# Altium PCB PCB.PcbDoc (part 4 of 4)
Units mm, origin at the board's own origin, x right, y up, seen from the top; angles counter-clockwise.
Board outline 90 x 90 mm, 4 copper layers (Top Layer (Signal), Int1 (GND), Int2 (Signal), Bottom Layer (Signal)), stack 1.586 mm thick; 151 components, 306 nets, 1178 pads, 350 vias.
Unrouted connection lines stored in the file: 80.
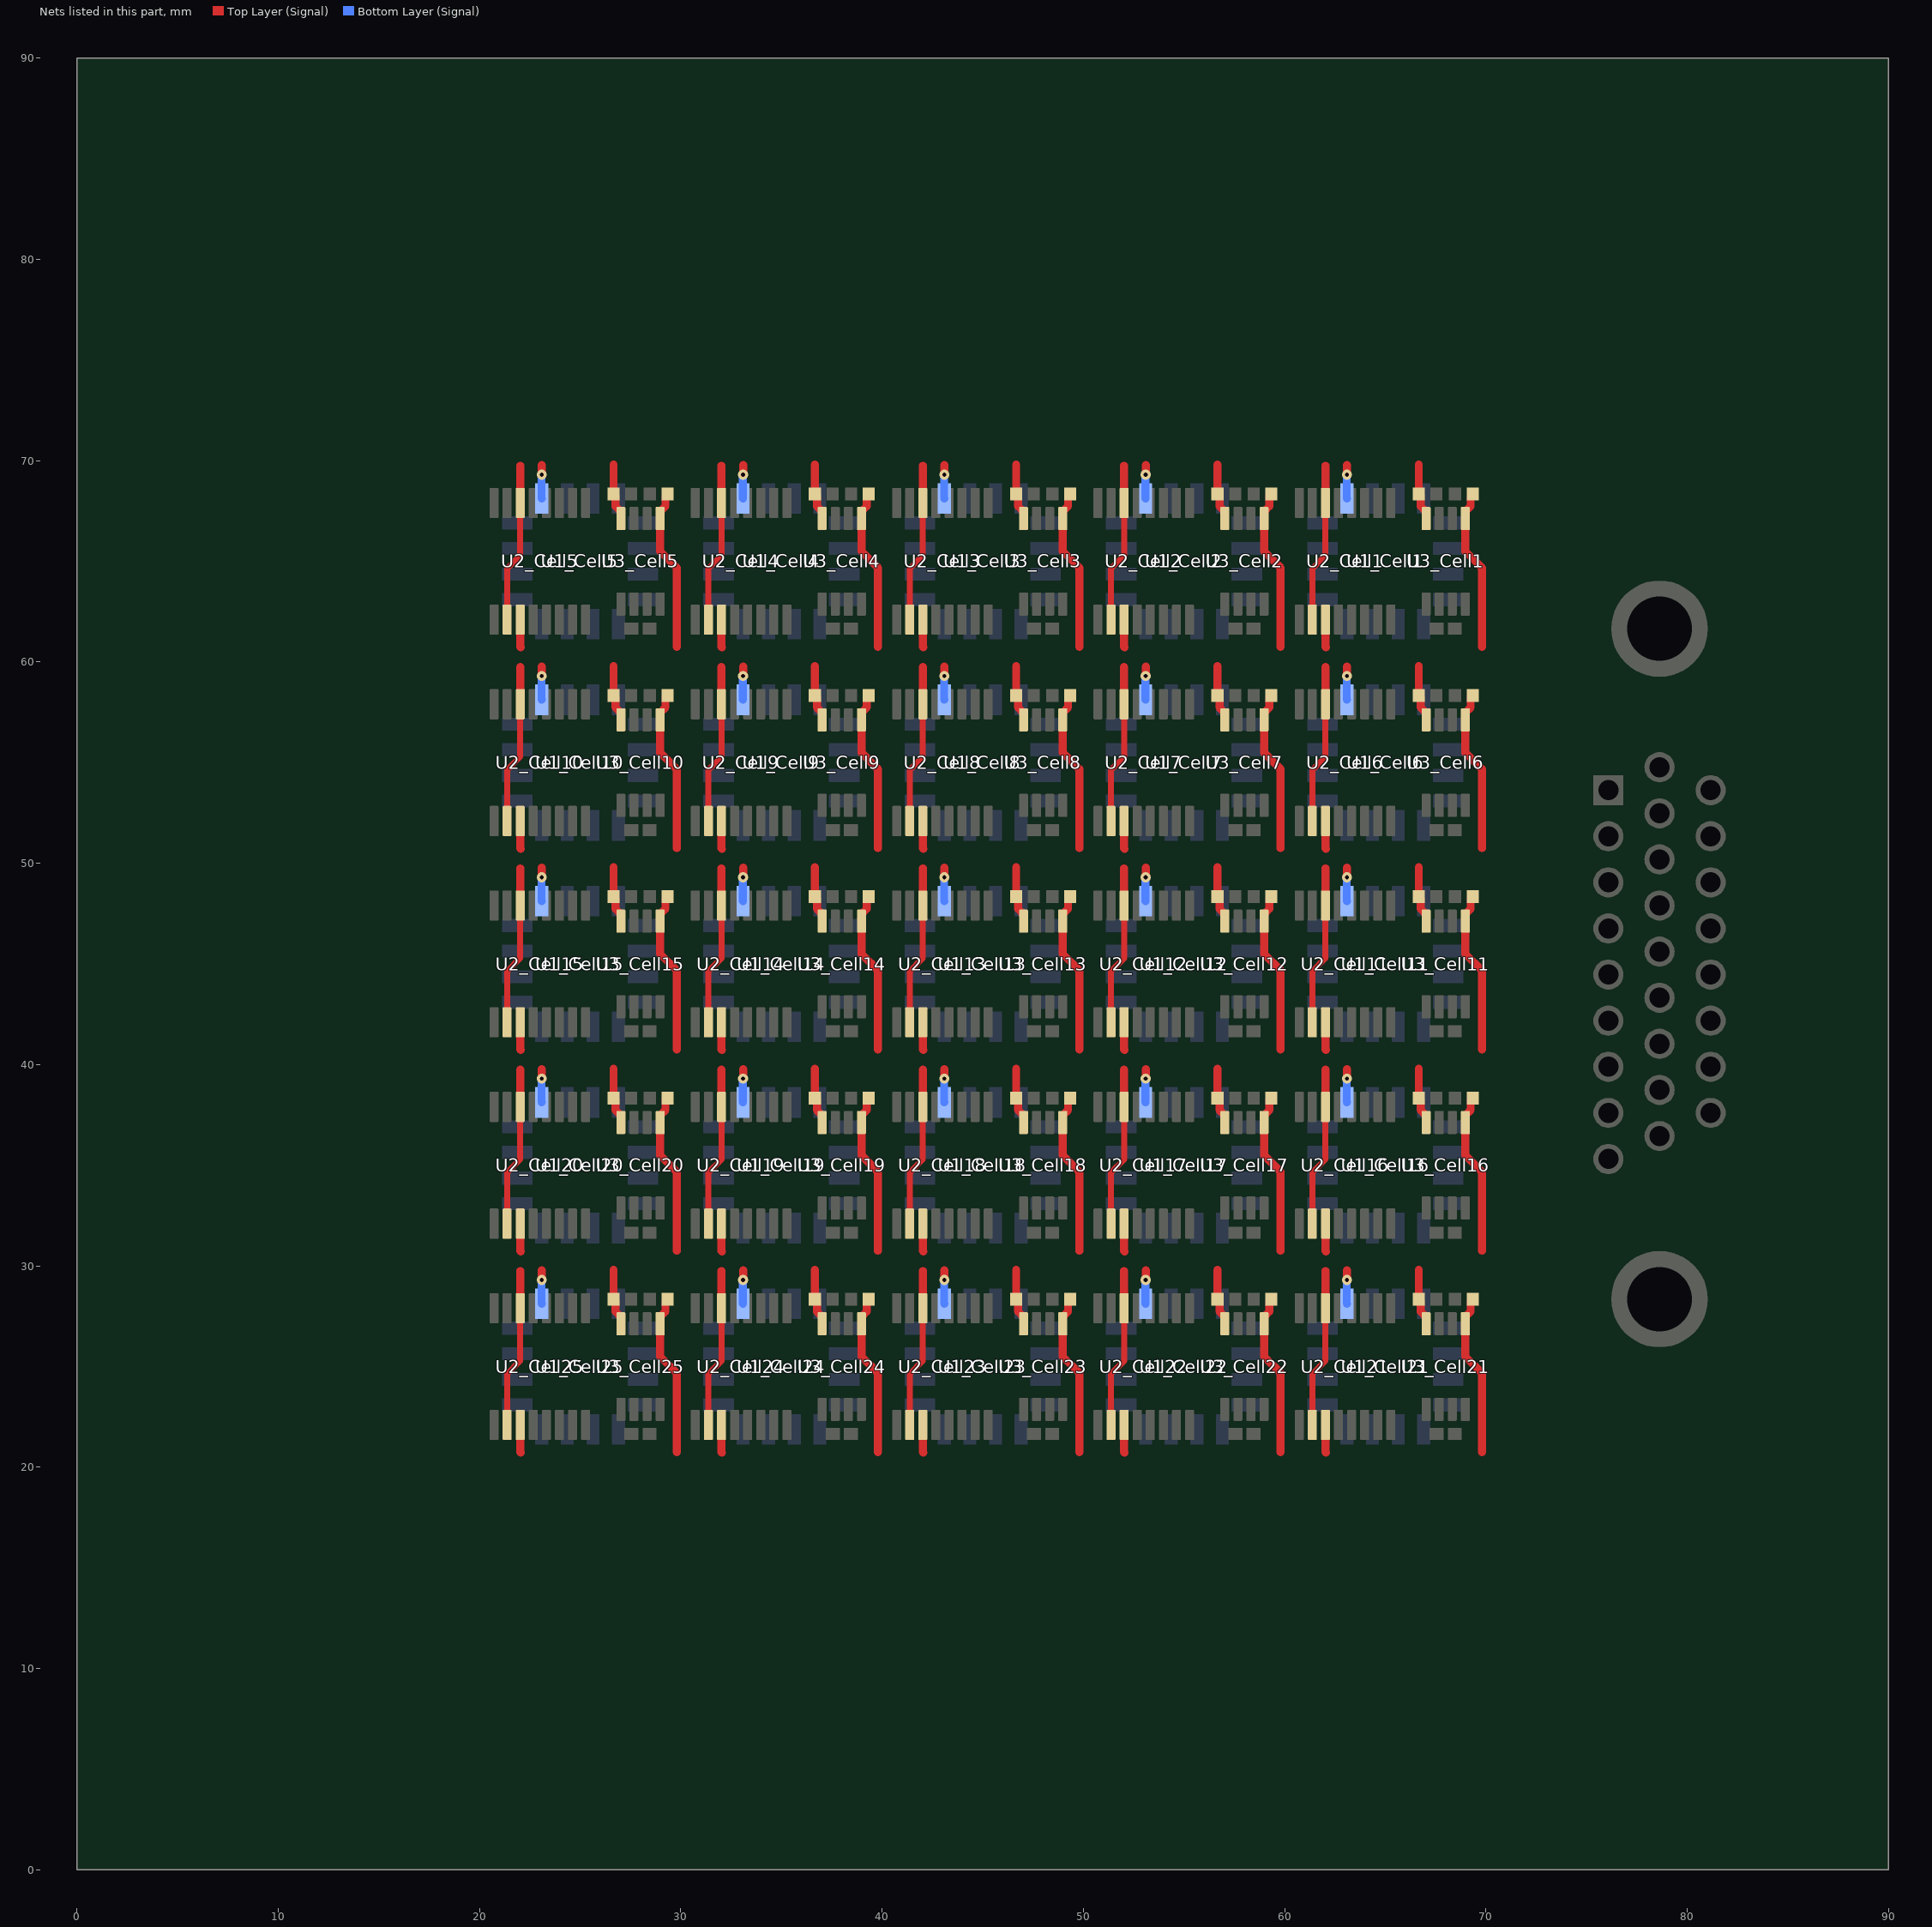
[diagram p6: the nets of this part, all layers, seen from the top]

## Via types
v1: diameter 0.5, hole 0.2, Top Layer (Signal) to Bottom Layer (Signal), 350 vias

## Nets (pads, with @x,y where several pads share a name; then routed paths per layer and width w, separated by ;. In a path a pad name is that pad's centre, name@x,y a point inside that pad or via, vN(x,y) a via of type N, cw(c..) or ccw(c..) an arc to the next point about the centre after c; other vN are vias at no path point) (continued)
V+: C1_Cell1.2 C1_Cell2.2 C1_Cell3.2 C1_Cell4.2 C1_Cell5.2 C1_Cell6.2 C1_Cell7.2 C1_Cell8.2 C1_Cell9.2 C1_Cell10.2 C1_Cell11.2 C1_Cell12.2 C1_Cell13.2 C1_Cell14.2 C1_Cell15.2 C1_Cell16.2 C1_Cell17.2 C1_Cell18.2 C1_Cell19.2 C1_Cell20.2 C1_Cell21.2 C1_Cell22.2 C1_Cell23.2 C1_Cell24.2 C1_Cell25.2 U1_Cell1.1 U1_Cell2.1 U1_Cell3.1 U1_Cell4.1 U1_Cell5.1 U1_Cell6.1 U1_Cell7.1 U1_Cell8.1 U1_Cell9.1 U1_Cell10.1 U1_Cell11.1 U1_Cell12.1 U1_Cell13.1 U1_Cell14.1 U1_Cell15.1 U1_Cell16.1 U1_Cell17.1 U1_Cell18.1 U1_Cell19.1 U1_Cell20.1 U1_Cell21.1 U1_Cell22.1 U1_Cell23.1 U1_Cell24.1 U1_Cell25.1 U2_Cell1.2 U2_Cell1.14 U2_Cell2.2 U2_Cell2.14 U2_Cell3.2 U2_Cell3.14 U2_Cell4.2 U2_Cell4.14 U2_Cell5.2 U2_Cell5.14 U2_Cell6.2 U2_Cell6.14 U2_Cell7.2 U2_Cell7.14 U2_Cell8.2 U2_Cell8.14 U2_Cell9.2 U2_Cell9.14 U2_Cell10.2 U2_Cell10.14 U2_Cell11.2 U2_Cell11.14 U2_Cell12.2 U2_Cell12.14 U2_Cell13.2 U2_Cell13.14 U2_Cell14.2 U2_Cell14.14 U2_Cell15.2 U2_Cell15.14 U2_Cell16.2 U2_Cell16.14 U2_Cell17.2 U2_Cell17.14 U2_Cell18.2 U2_Cell18.14 U2_Cell19.2 U2_Cell19.14 U2_Cell20.2 U2_Cell20.14 U2_Cell21.2 U2_Cell21.14 U2_Cell22.2 U2_Cell22.14 U2_Cell23.2 U2_Cell23.14 U2_Cell24.2 U2_Cell24.14 U2_Cell25.2 U2_Cell25.14 U3_Cell1.8 U3_Cell2.8 U3_Cell3.8 U3_Cell4.8 U3_Cell5.8 U3_Cell6.8 U3_Cell7.8 U3_Cell8.8 U3_Cell9.8 U3_Cell10.8 U3_Cell11.8 U3_Cell12.8 U3_Cell13.8 U3_Cell14.8 U3_Cell15.8 U3_Cell16.8 U3_Cell17.8 U3_Cell18.8 U3_Cell19.8 U3_Cell20.8 U3_Cell21.8 U3_Cell22.8 U3_Cell23.8 U3_Cell24.8 U3_Cell25.8 | length 310.2
  Top Layer (Signal) w0.3: U2_Cell25.2@21.375,22.1 21.375,24.637 22.025,25.287 U2_Cell25.14@22.025,27.9 ; U2_Cell20.2@21.375,32.1 21.375,34.637 22.025,35.287 U2_Cell20.14@22.025,37.9 ; U2_Cell15.2@21.375,42.1 21.375,44.637 22.025,45.287 U2_Cell15.14@22.025,47.9 ; U2_Cell10.2@21.375,52.1 21.375,54.637 22.025,55.287 U2_Cell10.14@22.025,57.9 ; U2_Cell5.2@21.375,62.1 21.375,64.637 22.025,65.287 U2_Cell5.14@22.025,67.9 ; U2_Cell24.2@31.375,22.1 31.375,24.637 32.025,25.287 U2_Cell24.14@32.025,27.9 ; U2_Cell19.2@31.375,32.1 31.375,34.637 32.025,35.287 U2_Cell19.14@32.025,37.9 ; U2_Cell14.2@31.375,42.1 31.375,44.637 32.025,45.287 U2_Cell14.14@32.025,47.9 ; U2_Cell9.2@31.375,52.1 31.375,54.637 32.025,55.287 U2_Cell9.14@32.025,57.9 ; U2_Cell4.2@31.375,62.1 31.375,64.637 32.025,65.287 U2_Cell4.14@32.025,67.9 ; U2_Cell23.2@41.375,22.1 41.375,24.637 42.025,25.287 U2_Cell23.14@42.025,27.9 ; U2_Cell18.2@41.375,32.1 41.375,34.637 42.025,35.287 U2_Cell18.14@42.025,37.9 ; U2_Cell13.2@41.375,42.1 41.375,44.637 42.025,45.287 U2_Cell13.14@42.025,47.9 ; U2_Cell8.2@41.375,52.1 41.375,54.637 42.025,55.287 U2_Cell8.14@42.025,57.9 ; U2_Cell3.2@41.375,62.1 41.375,64.637 42.025,65.287 U2_Cell3.14@42.025,67.9 ; U2_Cell22.2@51.375,22.1 51.375,24.637 52.025,25.287 U2_Cell22.14@52.025,27.9 ; U2_Cell17.2@51.375,32.1 51.375,34.637 52.025,35.287 U2_Cell17.14@52.025,37.9 ; U2_Cell12.2@51.375,42.1 51.375,44.637 52.025,45.287 U2_Cell12.14@52.025,47.9 ; U2_Cell7.2@51.375,52.1 51.375,54.637 52.025,55.287 U2_Cell7.14@52.025,57.9 ; U2_Cell2.2@51.375,62.1 51.375,64.637 52.025,65.287 U2_Cell2.14@52.025,67.9 ; U2_Cell21.2@61.375,22.1 61.375,24.637 62.025,25.287 U2_Cell21.14@62.025,27.9 ; U2_Cell16.2@61.375,32.1 61.375,34.637 62.025,35.287 U2_Cell16.14@62.025,37.9 ; U2_Cell11.2@61.375,42.1 61.375,44.637 62.025,45.287 U2_Cell11.14@62.025,47.9 ; U2_Cell6.2@61.375,52.1 61.375,54.637 62.025,55.287 U2_Cell6.14@62.025,57.9 ; U2_Cell1.2@61.375,62.1 61.375,64.637 62.025,65.287 U2_Cell1.14@62.025,67.9
  Top Layer (Signal) w0.4: U2_Cell25.14@22.025,27.9 22.025,29.75 ; U2_Cell20.14@22.025,37.9 22.025,39.75 ; U2_Cell15.14@22.025,47.9 22.025,49.75 ; U2_Cell10.14@22.025,57.9 22.025,59.75 ; U2_Cell5.14@22.025,67.9 22.025,69.75 ; v1(23.095,29.3) 23.1,29.305 23.1,29.775 ; v1(23.095,39.3) 23.1,39.305 23.1,39.775 ; v1(23.095,49.3) 23.1,49.305 23.1,49.775 ; v1(23.095,59.3) 23.1,59.305 23.1,59.775 ; v1(23.095,69.3) 23.1,69.305 23.1,69.775 ; 26.66,29.8 C1_Cell25.2@26.66,28.335 26.76,28.235 26.76,27.74 27.025,27.475 U3_Cell25.8@27.025,27.125 ; 26.66,39.8 C1_Cell20.2@26.66,38.335 26.76,38.235 26.76,37.74 27.025,37.475 U3_Cell20.8@27.025,37.125 ; 26.66,49.8 C1_Cell15.2@26.66,48.335 26.76,48.235 26.76,47.74 27.025,47.475 U3_Cell15.8@27.025,47.125 ; 26.66,59.8 C1_Cell10.2@26.66,58.335 26.76,58.235 26.76,57.74 27.025,57.475 U3_Cell10.8@27.025,57.125 ; 26.66,69.8 C1_Cell5.2@26.66,68.335 26.76,68.235 26.76,67.74 27.025,67.475 U3_Cell5.8@27.025,67.125 ; U2_Cell24.14@32.025,27.9 32.025,29.75 ; U2_Cell19.14@32.025,37.9 32.025,39.75 ; U2_Cell14.14@32.025,47.9 32.025,49.75 ; U2_Cell9.14@32.025,57.9 32.025,59.75 ; U2_Cell4.14@32.025,67.9 32.025,69.75 ; v1(33.095,29.3) 33.1,29.305 33.1,29.775 ; v1(33.095,39.3) 33.1,39.305 33.1,39.775 ; v1(33.095,49.3) 33.1,49.305 33.1,49.775 ; v1(33.095,59.3) 33.1,59.305 33.1,59.775 ; v1(33.095,69.3) 33.1,69.305 33.1,69.775 ; 36.66,29.8 C1_Cell24.2@36.66,28.335 36.76,28.235 36.76,27.74 37.025,27.475 U3_Cell24.8@37.025,27.125 ; 36.66,39.8 C1_Cell19.2@36.66,38.335 36.76,38.235 36.76,37.74 37.025,37.475 U3_Cell19.8@37.025,37.125 ; 36.66,49.8 C1_Cell14.2@36.66,48.335 36.76,48.235 36.76,47.74 37.025,47.475 U3_Cell14.8@37.025,47.125 ; 36.66,59.8 C1_Cell9.2@36.66,58.335 36.76,58.235 36.76,57.74 37.025,57.475 U3_Cell9.8@37.025,57.125 ; 36.66,69.8 C1_Cell4.2@36.66,68.335 36.76,68.235 36.76,67.74 37.025,67.475 U3_Cell4.8@37.025,67.125 ; U2_Cell23.14@42.025,27.9 42.025,29.75 ; U2_Cell18.14@42.025,37.9 42.025,39.75 ; U2_Cell13.14@42.025,47.9 42.025,49.75 ; U2_Cell8.14@42.025,57.9 42.025,59.75 ; U2_Cell3.14@42.025,67.9 42.025,69.75 ; v1(43.095,29.3) 43.1,29.305 43.1,29.775 ; v1(43.095,39.3) 43.1,39.305 43.1,39.775 ; v1(43.095,49.3) 43.1,49.305 43.1,49.775 ; v1(43.095,59.3) 43.1,59.305 43.1,59.775 ; v1(43.095,69.3) 43.1,69.305 43.1,69.775 ; 46.66,29.8 C1_Cell23.2@46.66,28.335 46.76,28.235 46.76,27.74 47.025,27.475 U3_Cell23.8@47.025,27.125 ; 46.66,39.8 C1_Cell18.2@46.66,38.335 46.76,38.235 46.76,37.74 47.025,37.475 U3_Cell18.8@47.025,37.125 ; 46.66,49.8 C1_Cell13.2@46.66,48.335 46.76,48.235 46.76,47.74 47.025,47.475 U3_Cell13.8@47.025,47.125 ; 46.66,59.8 C1_Cell8.2@46.66,58.335 46.76,58.235 46.76,57.74 47.025,57.475 U3_Cell8.8@47.025,57.125 ; 46.66,69.8 C1_Cell3.2@46.66,68.335 46.76,68.235 46.76,67.74 47.025,67.475 U3_Cell3.8@47.025,67.125 ; U2_Cell22.14@52.025,27.9 52.025,29.75 ; U2_Cell17.14@52.025,37.9 52.025,39.75 ; U2_Cell12.14@52.025,47.9 52.025,49.75 ; U2_Cell7.14@52.025,57.9 52.025,59.75 ; U2_Cell2.14@52.025,67.9 52.025,69.75 ; v1(53.095,29.3) 53.1,29.305 53.1,29.775 ; v1(53.095,39.3) 53.1,39.305 53.1,39.775 ; v1(53.095,49.3) 53.1,49.305 53.1,49.775 ; v1(53.095,59.3) 53.1,59.305 53.1,59.775 ; v1(53.095,69.3) 53.1,69.305 53.1,69.775 ; 56.66,29.8 C1_Cell22.2@56.66,28.335 56.76,28.235 56.76,27.74 57.025,27.475 U3_Cell22.8@57.025,27.125 ; 56.66,39.8 C1_Cell17.2@56.66,38.335 56.76,38.235 56.76,37.74 57.025,37.475 U3_Cell17.8@57.025,37.125 ; 56.66,49.8 C1_Cell12.2@56.66,48.335 56.76,48.235 56.76,47.74 57.025,47.475 U3_Cell12.8@57.025,47.125 ; 56.66,59.8 C1_Cell7.2@56.66,58.335 56.76,58.235 56.76,57.74 57.025,57.475 U3_Cell7.8@57.025,57.125 ; 56.66,69.8 C1_Cell2.2@56.66,68.335 56.76,68.235 56.76,67.74 57.025,67.475 U3_Cell2.8@57.025,67.125 ; U2_Cell21.14@62.025,27.9 62.025,29.75 ; U2_Cell16.14@62.025,37.9 62.025,39.75 ; U2_Cell11.14@62.025,47.9 62.025,49.75 ; U2_Cell6.14@62.025,57.9 62.025,59.75 ; U2_Cell1.14@62.025,67.9 62.025,69.75 ; v1(63.095,29.3) 63.1,29.305 63.1,29.775 ; v1(63.095,39.3) 63.1,39.305 63.1,39.775 ; v1(63.095,49.3) 63.1,49.305 63.1,49.775 ; v1(63.095,59.3) 63.1,59.305 63.1,59.775 ; v1(63.095,69.3) 63.1,69.305 63.1,69.775 ; 66.66,29.8 C1_Cell21.2@66.66,28.335 66.76,28.235 66.76,27.74 67.025,27.475 U3_Cell21.8@67.025,27.125 ; 66.66,39.8 C1_Cell16.2@66.66,38.335 66.76,38.235 66.76,37.74 67.025,37.475 U3_Cell16.8@67.025,37.125 ; 66.66,49.8 C1_Cell11.2@66.66,48.335 66.76,48.235 66.76,47.74 67.025,47.475 U3_Cell11.8@67.025,47.125 ; 66.66,59.8 C1_Cell6.2@66.66,58.335 66.76,58.235 66.76,57.74 67.025,57.475 U3_Cell6.8@67.025,57.125 ; 66.66,69.8 C1_Cell1.2@66.66,68.335 66.76,68.235 66.76,67.74 67.025,67.475 U3_Cell1.8@67.025,67.125
  Bottom Layer (Signal) w0.4: v1@23.075,29.3 23.085,29.29 23.085,28.133 U1_Cell25.1@23.095,28.123 ; v1@23.075,39.3 23.085,39.29 23.085,38.133 U1_Cell20.1@23.095,38.123 ; v1@23.075,49.3 23.085,49.29 23.085,48.133 U1_Cell15.1@23.095,48.123 ; v1@23.075,59.3 23.085,59.29 23.085,58.133 U1_Cell10.1@23.095,58.123 ; v1@23.075,69.3 23.085,69.29 23.085,68.133 U1_Cell5.1@23.095,68.123 ; v1@33.075,29.3 33.085,29.29 33.085,28.133 U1_Cell24.1@33.095,28.123 ; v1@33.075,39.3 33.085,39.29 33.085,38.133 U1_Cell19.1@33.095,38.123 ; v1@33.075,49.3 33.085,49.29 33.085,48.133 U1_Cell14.1@33.095,48.123 ; v1@33.075,59.3 33.085,59.29 33.085,58.133 U1_Cell9.1@33.095,58.123 ; v1@33.075,69.3 33.085,69.29 33.085,68.133 U1_Cell4.1@33.095,68.123 ; v1@43.075,29.3 43.085,29.29 43.085,28.133 U1_Cell23.1@43.095,28.123 ; v1@43.075,39.3 43.085,39.29 43.085,38.133 U1_Cell18.1@43.095,38.123 ; v1@43.075,49.3 43.085,49.29 43.085,48.133 U1_Cell13.1@43.095,48.123 ; v1@43.075,59.3 43.085,59.29 43.085,58.133 U1_Cell8.1@43.095,58.123 ; v1@43.075,69.3 43.085,69.29 43.085,68.133 U1_Cell3.1@43.095,68.123 ; v1@53.075,29.3 53.085,29.29 53.085,28.133 U1_Cell22.1@53.095,28.123 ; v1@53.075,39.3 53.085,39.29 53.085,38.133 U1_Cell17.1@53.095,38.123 ; v1@53.075,49.3 53.085,49.29 53.085,48.133 U1_Cell12.1@53.095,48.123 ; v1@53.075,59.3 53.085,59.29 53.085,58.133 U1_Cell7.1@53.095,58.123 ; v1@53.075,69.3 53.085,69.29 53.085,68.133 U1_Cell2.1@53.095,68.123 ; v1@63.075,29.3 63.085,29.29 63.085,28.133 U1_Cell21.1@63.095,28.123 ; v1@63.075,39.3 63.085,39.29 63.085,38.133 U1_Cell16.1@63.095,38.123 ; v1@63.075,49.3 63.085,49.29 63.085,48.133 U1_Cell11.1@63.095,48.123 ; v1@63.075,59.3 63.085,59.29 63.085,58.133 U1_Cell6.1@63.095,58.123 ; v1@63.075,69.3 63.085,69.29 63.085,68.133 U1_Cell1.1@63.095,68.123
V-: C2_Cell1.1 C2_Cell2.1 C2_Cell3.1 C2_Cell4.1 C2_Cell5.1 C2_Cell6.1 C2_Cell7.1 C2_Cell8.1 C2_Cell9.1 C2_Cell10.1 C2_Cell11.1 C2_Cell12.1 C2_Cell13.1 C2_Cell14.1 C2_Cell15.1 C2_Cell16.1 C2_Cell17.1 C2_Cell18.1 C2_Cell19.1 C2_Cell20.1 C2_Cell21.1 C2_Cell22.1 C2_Cell23.1 C2_Cell24.1 C2_Cell25.1 U2_Cell1.3 U2_Cell2.3 U2_Cell3.3 U2_Cell4.3 U2_Cell5.3 U2_Cell6.3 U2_Cell7.3 U2_Cell8.3 U2_Cell9.3 U2_Cell10.3 U2_Cell11.3 U2_Cell12.3 U2_Cell13.3 U2_Cell14.3 U2_Cell15.3 U2_Cell16.3 U2_Cell17.3 U2_Cell18.3 U2_Cell19.3 U2_Cell20.3 U2_Cell21.3 U2_Cell22.3 U2_Cell23.3 U2_Cell24.3 U2_Cell25.3 U3_Cell1.5 U3_Cell2.5 U3_Cell3.5 U3_Cell4.5 U3_Cell5.5 U3_Cell6.5 U3_Cell7.5 U3_Cell8.5 U3_Cell9.5 U3_Cell10.5 U3_Cell11.5 U3_Cell12.5 U3_Cell13.5 U3_Cell14.5 U3_Cell15.5 U3_Cell16.5 U3_Cell17.5 U3_Cell18.5 U3_Cell19.5 U3_Cell20.5 U3_Cell21.5 U3_Cell22.5 U3_Cell23.5 U3_Cell24.5 U3_Cell25.5 | length 242.6
  Top Layer (Signal) w0.3: C2_Cell25.1@29.34,28.335 29.34,28.235 C2_Cell25.1@29.44,28.335 ; C2_Cell20.1@29.34,38.335 29.34,38.235 C2_Cell20.1@29.44,38.335 ; C2_Cell15.1@29.34,48.335 29.34,48.235 C2_Cell15.1@29.44,48.335 ; C2_Cell10.1@29.34,58.335 29.34,58.235 C2_Cell10.1@29.44,58.335 ; C2_Cell5.1@29.34,68.335 29.34,68.235 C2_Cell5.1@29.44,68.335 ; C2_Cell24.1@39.34,28.335 39.34,28.235 C2_Cell24.1@39.44,28.335 ; C2_Cell19.1@39.34,38.335 39.34,38.235 C2_Cell19.1@39.44,38.335 ; C2_Cell14.1@39.34,48.335 39.34,48.235 C2_Cell14.1@39.44,48.335 ; C2_Cell9.1@39.34,58.335 39.34,58.235 C2_Cell9.1@39.44,58.335 ; C2_Cell4.1@39.34,68.335 39.34,68.235 C2_Cell4.1@39.44,68.335 ; C2_Cell23.1@49.34,28.335 49.34,28.235 C2_Cell23.1@49.44,28.335 ; C2_Cell18.1@49.34,38.335 49.34,38.235 C2_Cell18.1@49.44,38.335 ; C2_Cell13.1@49.34,48.335 49.34,48.235 C2_Cell13.1@49.44,48.335 ; C2_Cell8.1@49.34,58.335 49.34,58.235 C2_Cell8.1@49.44,58.335 ; C2_Cell3.1@49.34,68.335 49.34,68.235 C2_Cell3.1@49.44,68.335 ; C2_Cell22.1@59.34,28.335 59.34,28.235 C2_Cell22.1@59.44,28.335 ; C2_Cell17.1@59.34,38.335 59.34,38.235 C2_Cell17.1@59.44,38.335 ; C2_Cell12.1@59.34,48.335 59.34,48.235 C2_Cell12.1@59.44,48.335 ; C2_Cell7.1@59.34,58.335 59.34,58.235 C2_Cell7.1@59.44,58.335 ; C2_Cell2.1@59.34,68.335 59.34,68.235 C2_Cell2.1@59.44,68.335 ; C2_Cell21.1@69.34,28.335 69.34,28.235 C2_Cell21.1@69.44,28.335 ; C2_Cell16.1@69.34,38.335 69.34,38.235 C2_Cell16.1@69.44,38.335 ; C2_Cell11.1@69.34,48.335 69.34,48.235 C2_Cell11.1@69.44,48.335 ; C2_Cell6.1@69.34,58.335 69.34,58.235 C2_Cell6.1@69.44,58.335 ; C2_Cell1.1@69.34,68.335 69.34,68.235 C2_Cell1.1@69.44,68.335
  Top Layer (Signal) w0.4: U2_Cell25.3@22.025,22.1 22.025,20.75 22.05,20.725 ; U2_Cell20.3@22.025,32.1 22.025,30.75 22.05,30.725 ; U2_Cell15.3@22.025,42.1 22.025,40.75 22.05,40.725 ; U2_Cell10.3@22.025,52.1 22.025,50.75 22.05,50.725 ; U2_Cell5.3@22.025,62.1 22.025,60.75 22.05,60.725 ; C2_Cell25.1@29.34,28.335 29.24,28.235 29.24,27.74 28.975,27.475 U3_Cell25.5@28.975,27.125 28.975,25.5 29.8,24.675 29.8,20.75 ; C2_Cell20.1@29.34,38.335 29.24,38.235 29.24,37.74 28.975,37.475 U3_Cell20.5@28.975,37.125 28.975,35.5 29.8,34.675 29.8,30.75 ; C2_Cell15.1@29.34,48.335 29.24,48.235 29.24,47.74 28.975,47.475 U3_Cell15.5@28.975,47.125 28.975,45.5 29.8,44.675 29.8,40.75 ; C2_Cell10.1@29.34,58.335 29.24,58.235 29.24,57.74 28.975,57.475 U3_Cell10.5@28.975,57.125 28.975,55.5 29.8,54.675 29.8,50.75 ; C2_Cell5.1@29.34,68.335 29.24,68.235 29.24,67.74 28.975,67.475 U3_Cell5.5@28.975,67.125 28.975,65.5 29.8,64.675 29.8,60.75 ; U2_Cell24.3@32.025,22.1 32.025,20.75 32.05,20.725 ; U2_Cell19.3@32.025,32.1 32.025,30.75 32.05,30.725 ; U2_Cell14.3@32.025,42.1 32.025,40.75 32.05,40.725 ; U2_Cell9.3@32.025,52.1 32.025,50.75 32.05,50.725 ; U2_Cell4.3@32.025,62.1 32.025,60.75 32.05,60.725 ; C2_Cell24.1@39.34,28.335 39.24,28.235 39.24,27.74 38.975,27.475 U3_Cell24.5@38.975,27.125 38.975,25.5 39.8,24.675 39.8,20.75 ; C2_Cell19.1@39.34,38.335 39.24,38.235 39.24,37.74 38.975,37.475 U3_Cell19.5@38.975,37.125 38.975,35.5 39.8,34.675 39.8,30.75 ; C2_Cell14.1@39.34,48.335 39.24,48.235 39.24,47.74 38.975,47.475 U3_Cell14.5@38.975,47.125 38.975,45.5 39.8,44.675 39.8,40.75 ; C2_Cell9.1@39.34,58.335 39.24,58.235 39.24,57.74 38.975,57.475 U3_Cell9.5@38.975,57.125 38.975,55.5 39.8,54.675 39.8,50.75 ; C2_Cell4.1@39.34,68.335 39.24,68.235 39.24,67.74 38.975,67.475 U3_Cell4.5@38.975,67.125 38.975,65.5 39.8,64.675 39.8,60.75 ; U2_Cell23.3@42.025,22.1 42.025,20.75 42.05,20.725 ; U2_Cell18.3@42.025,32.1 42.025,30.75 42.05,30.725 ; U2_Cell13.3@42.025,42.1 42.025,40.75 42.05,40.725 ; U2_Cell8.3@42.025,52.1 42.025,50.75 42.05,50.725 ; U2_Cell3.3@42.025,62.1 42.025,60.75 42.05,60.725 ; C2_Cell23.1@49.34,28.335 49.24,28.235 49.24,27.74 48.975,27.475 U3_Cell23.5@48.975,27.125 48.975,25.5 49.8,24.675 49.8,20.75 ; C2_Cell18.1@49.34,38.335 49.24,38.235 49.24,37.74 48.975,37.475 U3_Cell18.5@48.975,37.125 48.975,35.5 49.8,34.675 49.8,30.75 ; C2_Cell13.1@49.34,48.335 49.24,48.235 49.24,47.74 48.975,47.475 U3_Cell13.5@48.975,47.125 48.975,45.5 49.8,44.675 49.8,40.75 ; C2_Cell8.1@49.34,58.335 49.24,58.235 49.24,57.74 48.975,57.475 U3_Cell8.5@48.975,57.125 48.975,55.5 49.8,54.675 49.8,50.75 ; C2_Cell3.1@49.34,68.335 49.24,68.235 49.24,67.74 48.975,67.475 U3_Cell3.5@48.975,67.125 48.975,65.5 49.8,64.675 49.8,60.75 ; U2_Cell22.3@52.025,22.1 52.025,20.75 52.05,20.725 ; U2_Cell17.3@52.025,32.1 52.025,30.75 52.05,30.725 ; U2_Cell12.3@52.025,42.1 52.025,40.75 52.05,40.725 ; U2_Cell7.3@52.025,52.1 52.025,50.75 52.05,50.725 ; U2_Cell2.3@52.025,62.1 52.025,60.75 52.05,60.725 ; C2_Cell22.1@59.34,28.335 59.24,28.235 59.24,27.74 58.975,27.475 U3_Cell22.5@58.975,27.125 58.975,25.5 59.8,24.675 59.8,20.75 ; C2_Cell17.1@59.34,38.335 59.24,38.235 59.24,37.74 58.975,37.475 U3_Cell17.5@58.975,37.125 58.975,35.5 59.8,34.675 59.8,30.75 ; C2_Cell12.1@59.34,48.335 59.24,48.235 59.24,47.74 58.975,47.475 U3_Cell12.5@58.975,47.125 58.975,45.5 59.8,44.675 59.8,40.75 ; C2_Cell7.1@59.34,58.335 59.24,58.235 59.24,57.74 58.975,57.475 U3_Cell7.5@58.975,57.125 58.975,55.5 59.8,54.675 59.8,50.75 ; C2_Cell2.1@59.34,68.335 59.24,68.235 59.24,67.74 58.975,67.475 U3_Cell2.5@58.975,67.125 58.975,65.5 59.8,64.675 59.8,60.75 ; U2_Cell21.3@62.025,22.1 62.025,20.75 62.05,20.725 ; U2_Cell16.3@62.025,32.1 62.025,30.75 62.05,30.725 ; U2_Cell11.3@62.025,42.1 62.025,40.75 62.05,40.725 ; U2_Cell6.3@62.025,52.1 62.025,50.75 62.05,50.725 ; U2_Cell1.3@62.025,62.1 62.025,60.75 62.05,60.725 ; C2_Cell21.1@69.34,28.335 69.24,28.235 69.24,27.74 68.975,27.475 U3_Cell21.5@68.975,27.125 68.975,25.5 69.8,24.675 69.8,20.75 ; C2_Cell16.1@69.34,38.335 69.24,38.235 69.24,37.74 68.975,37.475 U3_Cell16.5@68.975,37.125 68.975,35.5 69.8,34.675 69.8,30.75 ; C2_Cell11.1@69.34,48.335 69.24,48.235 69.24,47.74 68.975,47.475 U3_Cell11.5@68.975,47.125 68.975,45.5 69.8,44.675 69.8,40.75 ; C2_Cell6.1@69.34,58.335 69.24,58.235 69.24,57.74 68.975,57.475 U3_Cell6.5@68.975,57.125 68.975,55.5 69.8,54.675 69.8,50.75 ; C2_Cell1.1@69.34,68.335 69.24,68.235 69.24,67.74 68.975,67.475 U3_Cell1.5@68.975,67.125 68.975,65.5 69.8,64.675 69.8,60.75
pads on no net: U1_Cell1.2 U1_Cell1.7 U1_Cell1.15 U1_Cell2.2 U1_Cell2.7 U1_Cell2.15 U1_Cell3.2 U1_Cell3.7 U1_Cell3.15 U1_Cell4.2 U1_Cell4.7 U1_Cell4.15 U1_Cell5.2 U1_Cell5.7 U1_Cell5.15 U1_Cell6.2 U1_Cell6.7 U1_Cell6.15 U1_Cell7.2 U1_Cell7.7 U1_Cell7.15 U1_Cell8.2 U1_Cell8.7 U1_Cell8.15 U1_Cell9.2 U1_Cell9.7 U1_Cell9.15 U1_Cell10.2 U1_Cell10.7 U1_Cell10.15 U1_Cell11.2 U1_Cell11.7 U1_Cell11.15 U1_Cell12.2 U1_Cell12.7 U1_Cell12.15 U1_Cell13.2 U1_Cell13.7 U1_Cell13.15 U1_Cell14.2 U1_Cell14.7 U1_Cell14.15 U1_Cell15.2 U1_Cell15.7 U1_Cell15.15 U1_Cell16.2 U1_Cell16.7 U1_Cell16.15 U1_Cell17.2 U1_Cell17.7 U1_Cell17.15 U1_Cell18.2 U1_Cell18.7 U1_Cell18.15 U1_Cell19.2 U1_Cell19.7 U1_Cell19.15 U1_Cell20.2 U1_Cell20.7 U1_Cell20.15 U1_Cell21.2 U1_Cell21.7 U1_Cell21.15 U1_Cell22.2 U1_Cell22.7 U1_Cell22.15 U1_Cell23.2 U1_Cell23.7 U1_Cell23.15 U1_Cell24.2 U1_Cell24.7 U1_Cell24.15 U1_Cell25.2 U1_Cell25.7 U1_Cell25.15

## Polygon pours and split planes (outlines as drawn)
GND on Int1 (GND) "GND_L02_P000" (solid, pour order 0): 2.5,2.5 87.5,2.5 87.5,87.5 2.5,87.5

## Other copper
Top Layer (Signal):
  rectangle net V+: 20,29.6 70,30
  rectangle net V+: 20,39.6 70,40
  rectangle net V+: 20,49.6 70,50
  rectangle net V+: 20,59.6 70,60
  rectangle net V-: 20,20.5 70,20.9
  rectangle net V-: 20,30.5 70,30.9
  rectangle net V-: 20,40.5 70,40.9
  rectangle net V-: 20,50.5 70,50.9
  rectangle net V-: 20,60.5 70,60.9
  rectangle net V+: 20,69.6 70,70

## Text inside footprints (layer, text, board x,y; h text height)
J2: Top Overlay "26" at 81.7,34.8 h1.02 r90; Mechanical 2 "PCB Edge" at 91.52,41.6 h1.02 r90